# EAGLE board carLights (EAGLE 9.7.0)

Size 255.62 x 142.86 mm. Coordinates in mm from the lower left corner, seen from the top.
Outline: 0,0 255.62,0 255.62,142.86 0,142.86 0,0
Copper layers (1*16): Top 0.035mm / dielectric 1.5mm / Bottom 0.035mm
Design rules "default": minimum track width 6mil, minimum drill 0.35mm, track to track 6mil, track to pad 6mil, pad to pad 6mil, via to via 6mil, smd to smd 6mil, copper to edge 40mil, drill to drill 6mil, minimum pad ring 10mil, minimum via ring 8mil, stop-mask expansion 4mil, vias tented up to drill 0mil, thermal gap 10mil

## Footprints (pad centres in the part's own frame; a part is rotated, then mirrored left to right if it is on the bottom)
BATTERY-GENERIC = drill 1.118 pad 3.15 octagon: + 2.54,0; - -2.54,0
LEDRD254W60D565H860B_W = drill 0.981 pad 1.581: 1 -1.27,0; 2 1.27,0
LEDRD254W60D565H860B = drill 0.981 pad 1.581: 1 -1.27,0; 2 1.27,0
LEDRD254W60D565H860B_O = drill 0.981 pad 1.581: 1 -1.27,0; 2 1.27,0
RESAD1016W63L850D250B = drill 0.83 pad 1.43: 1 -5.08,0; 2 5.08,0
GL5528 = drill 0.8 pad 1.4: 1 -1.702,0; 2 1.702,0
SWITCH-SPDT-PTH-8.5X3.7MM = drill 1.016 pad 1.88: 1 -2.54,0; 2 0,0; 3 2.54,0
SWITCH-MOMENTARY-PTH-6.5MM = drill 1.016 pad 1.88: 1 -3.251,2.261; 2 3.251,2.261; 3 -3.251,-2.261; 4 3.251,-2.261
ARDUINO-UNO-R3-SHIELD = drill 1.016 pad 1.88: 3.3V 24.13,-2.54; 5V 24.13,0; A0 24.13,12.7; A1 24.13,15.24; A2 24.13,17.78; A3 24.13,20.32; A4 24.13,22.86; A5 24.13,25.4; AREF -24.13,-13.97; D2 -24.13,20.32; D3 -24.13,17.78; D4 -24.13,15.24; D5 -24.13,12.7; D6 -24.13,10.16; D7 -24.13,7.62; D8 -24.13,3.81; D9 -24.13,1.27; D10 -24.13,-1.27; D11 -24.13,-3.81; D12 -24.13,-6.35; D13 -24.13,-8.89; GND@0 24.13,2.54; GND@1 24.13,5.08; GND@2 -24.13,-11.43; IOREF 24.13,-7.62; NC 24.13,-10.16; RES 24.13,-5.08; RX -24.13,25.4; SCL -24.13,-19.05; SDA -24.13,-16.51; TX -24.13,22.86; VIN 24.13,7.62

## Placement (x,y rotation side)
BAT1  1.5V  [BATTERY-GENERIC]  212.57,117.68 0 top
BAT2  1.5V  [BATTERY-GENERIC]  230.13,117.36 0 top
BAT3  1.5V  [BATTERY-GENERIC]  247.37,117.68 0 top
D1  WHITE  [LEDRD254W60D565H860B_W]  97.16,8.05 180 top
D2  RED  [LEDRD254W60D565H860B]  102.24,8.05 180 top
D3  ORANGE  [LEDRD254W60D565H860B_O]  107.32,8.05 180 top
D4  ORANGE  [LEDRD254W60D565H860B_O]  158.12,8.05 180 top
D5  RED  [LEDRD254W60D565H860B]  163.2,8.05 180 top
D6  WHITE  [LEDRD254W60D565H860B_W]  168.28,8.05 180 top
R1  0.33k  [RESAD1016W63L850D250B]  98.43,18.21 90 top
R2  0.33k  [RESAD1016W63L850D250B]  103.51,18.21 90 top
R3  0.33k  [RESAD1016W63L850D250B]  108.59,18.21 90 top
R4  0.33k  [RESAD1016W63L850D250B]  159.39,18.21 90 top
R5  0.33k  [RESAD1016W63L850D250B]  164.47,18.21 90 top
R6  0.33k  [RESAD1016W63L850D250B]  169.55,18.21 90 top
R7  PHOTOCELL_GL5528  [GL5528]  112.96,84.11 0 top
R8  10k  [RESAD1016W63L850D250B]  124.39,61.25 90 top
R9  10k  [RESAD1016W63L850D250B]  137.09,61.25 90 top
R10  10k  [RESAD1016W63L850D250B]  144.71,61.25 90 top
R11  10k  [RESAD1016W63L850D250B]  157.41,61.25 90 top
S1  TOGGLE  [SWITCH-SPDT-PTH-8.5X3.7MM]  240.03,135.88 0 top
S2  SWITCH_MOMENTARY  [SWITCH-MOMENTARY-PTH-6.5MM]  139.63,85.38 90 top
S3  SWITCH_MOMENTARY  [SWITCH-MOMENTARY-PTH-6.5MM]  126.93,77.76 90 top
S4  SWITCH_MOMENTARY  [SWITCH-MOMENTARY-PTH-6.5MM]  159.95,77.76 90 top
S5  SWITCH_MOMENTARY  [SWITCH-MOMENTARY-PTH-6.5MM]  147.25,85.38 90 top
U1  ARDUINO-UNO-R3-SHIELD  [ARDUINO-UNO-R3-SHIELD]  47.88,86.83 270 top

## Library data of the parts
BAT1-BAT3 R1-R11 S1-S5 U1 = Tinkercad
D1 D6 = Tinkercad; CATEGORY: Opto-Electronic; SUB-CATEGORY: LED; VALUE: LED_WHITE
D2 D5 = Tinkercad; CATEGORY: Opto-Electronic; SUB-CATEGORY: LED; VALUE: LED_RED
D3 D4 = Tinkercad; CATEGORY: Opto-Electronic; SUB-CATEGORY: LED; VALUE: LED_ORANGE

## Nets
BAT1+: BAT1.+ BAT2.-
BAT1-: BAT1.- D1.2 D2.2 D3.2 D4.2 D5.2 D6.2 R8.1 R9.1 R10.1 R11.1 U1.GND@0 U1.GND@1 U1.GND@2
BAT2+: BAT2.+ BAT3.-
BAT3+: BAT3.+ S1.2
D1_A: D1.1 R1.1
D2_A: D2.1 R2.1
D3_A: D3.1 R3.1
D4_A: D4.1 R4.1
D5_A: D5.1 R5.1
D6_A: D6.1 R6.1
S3_3: S1.1 S2.3 S2.4 S3.3 S3.4 S4.3 S4.4 S5.3 S5.4
U1_D2: R10.2 S5.1 S5.2 U1.D2
U1_D3: R3.2 U1.D3
U1_D4: R9.2 S2.1 S2.2 U1.D4
U1_D5: R4.2 U1.D5
U1_D6: R1.2 R6.2 U1.D6
U1_D7: R8.2 S3.1 S3.2 U1.D7
U1_D9: R2.2 R5.2 U1.D9
U1_TX: R11.2 S4.1 S4.2 U1.TX

## Tracks (layer width: path | path; a pad name or v marks a point on that pad's centre or on a via)
BAT1+  (1 unrouted)
BAT1-  (13 unrouted)
BAT2+  (1 unrouted)
BAT3+  (1 unrouted)
D1_A  (1 unrouted)
D2_A  (1 unrouted)
D3_A  (1 unrouted)
D4_A  (1 unrouted)
D5_A  (1 unrouted)
D6_A  (1 unrouted)
S3_3  (8 unrouted)
U1_D2  (3 unrouted)
U1_D3  (1 unrouted)
U1_D4  (3 unrouted)
U1_D5  (1 unrouted)
U1_D6  (2 unrouted)
U1_D7  (3 unrouted)
U1_D9  (2 unrouted)
U1_TX  (3 unrouted)